# Altium PCB Antenna.PcbDoc
Units mil, origin at the board's own origin, x right, y up, seen from the top; angles counter-clockwise.
Board outline 2240 x 1440 mil, 2 copper layers (Top Layer, Bottom Layer); 1 components, 0 nets, 3 pads, 8 vias.
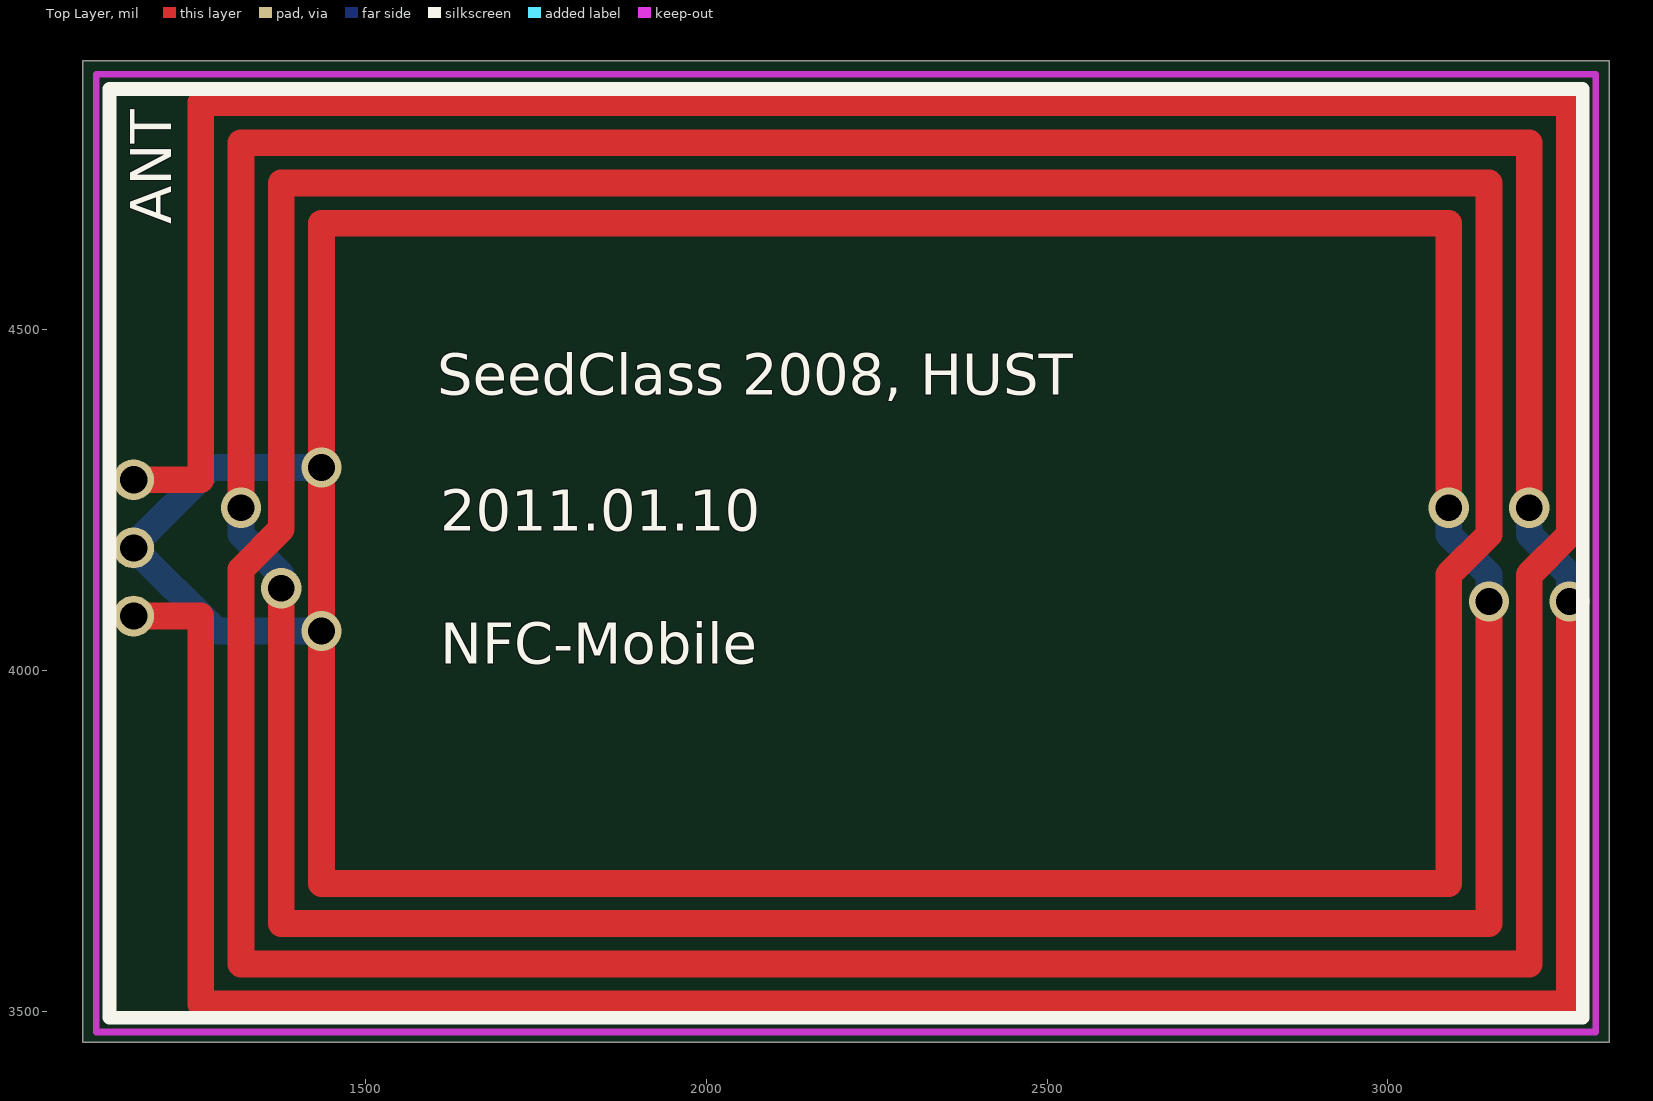
[diagram p0: Top Layer view]
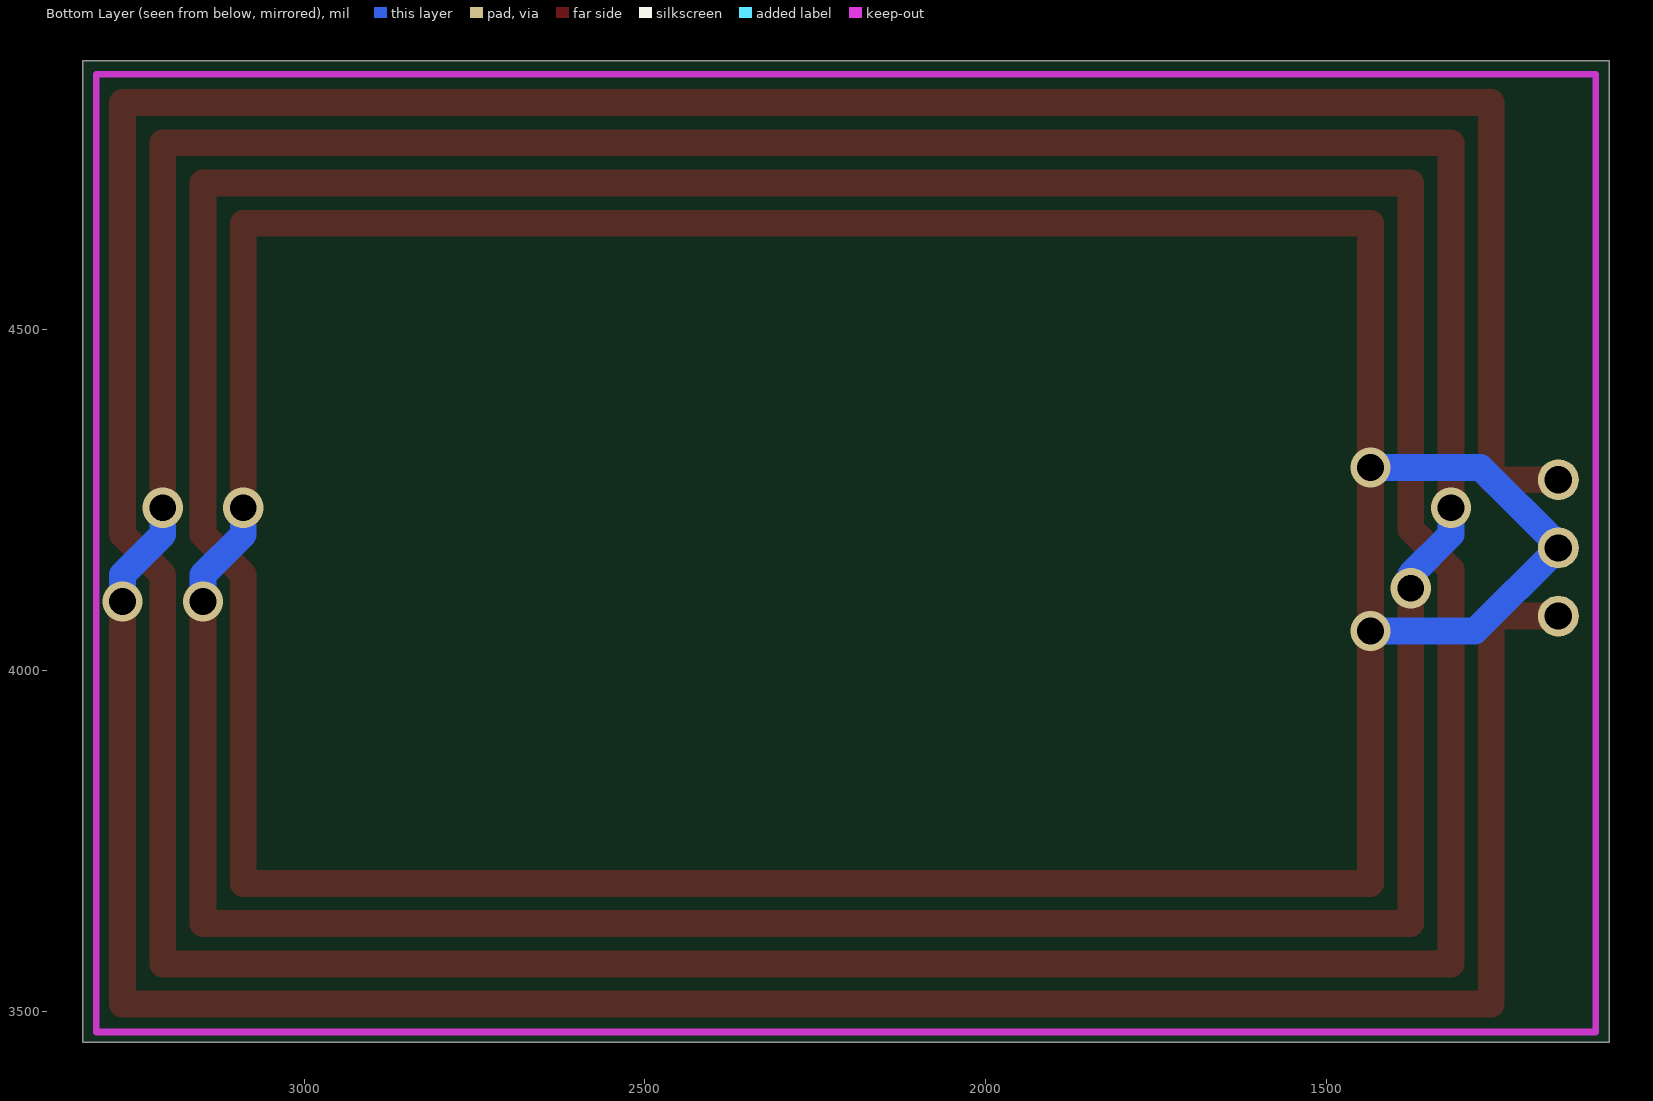
[diagram p1: Bottom Layer view, seen from below]

## Layer stack, top to bottom
Top Layer: signal copper 1.4
Dielectric: dielectric 12.6, FR-4, Dk 4.8
Bottom Layer: signal copper 1.4

## Board outline
1085,4895 3325,4895 3325,3455 1085,3455

## Design rules (kind name [scope] priority, off if disabled: settings)
Clearance [All] p1: gap=10
ComponentClearance [All] p1: gap=10 collisioncheckmode=3 verticalgap=10
PolygonConnect [All] p1: connectstyle=Relief reliefconductorwidth=10 reliefentries=4 polygonreliefangle="90 Angle"
RoutingVias [All] p1: holewidth=28 width=50 viastyle="Through Hole" minholewidth=28 minwidth=50 maxholewidth=28 maxwidth=50
SolderMaskExpansion [All] p1: expansion=4
TestPointUsage [All] p1: valid=0 allowmultiple=FALSE
Testpoint [All] p1: side=15 testpointundercomponent=TRUE minsize=40 maxsize=100 preferedsize=60 minholesize=0 maxholesize=40 preferedholesize=32 testpointgrid=1 style=1023 order=0123456789
Width [All] p1: maxlimit=10 minlimit=10 preferedwidth=10
18 further rules are at their usual default settings.

## Components (designator, comment, footprint, x,y, rotation, side; value= is the part's Value field where it differs from the comment)
ANT "Antenna 13.56MHz" ANTENNA-13.56MHZ 1160,4180 r0 top

## Footprints (in the part's own frame and the unit in brackets; to place one, negate y for a bottom-side part, rotate by r counter-clockwise, add the part's x,y. Pads: shape width x height; smd on the part's side, far side on the other; paste and mask are expansions set on the pad)
ANTENNA-13.56MHZ [mil]
  round 60 hole 40: 1(0,100) 2(0,0) 3(0,-100)
  Top Layer lines w39.37: 0,-100 98.43,-100 98.43,-669.29 2106.3,-669.29 2106.3,-78.74 ; 0,100 98.43,100 98.43,653.54 2106.3,653.54 2106.3,19.69 2047.24,-39.37 2047.24,-118.11 2047.24,-610.24 157.48,-610.24 157.48,-31.5 216.54,27.56 216.54,535.43 1988.19,535.43 1988.19,19.69 1929.13,-39.37 1929.13,-492.13 275.59,-492.13 275.59,476.38 1929.13,476.38 1929.13,59.06 ; 157.48,59.06 157.48,594.49 2047.24,594.49 2047.24,59.06 ; 216.54,-59.06 216.54,-551.18 1988.19,-551.18 1988.19,-78.74
  Bottom Layer lines w39.37: 157.48,59.06 157.48,19.69 216.54,-39.37 216.54,-59.06 ; 275.59,-122.05 122.05,-122.05 0,0 0,3.94 114.17,118.11 275.59,118.11 ; 1929.13,59.06 1929.13,19.69 1988.19,-39.37 1988.19,-78.74 ; 2047.24,59.06 2047.24,19.69 2106.3,-39.37 2106.3,-78.74
  silkscreen extent -35,-689 2126,673

## Part data
ANT: library part Antenna-13.56MHz

## Via types
v1: diameter 59.06, hole 39.37, Top Layer to Bottom Layer, 8 vias

## Nets (pads, with @x,y where several pads share a name; then routed paths per layer and width w, separated by ;. In a path a pad name is that pad's centre, name@x,y a point inside that pad or via, vN(x,y) a via of type N, cw(c..) or ccw(c..) an arc to the next point about the centre after c; other vN are vias at no path point)
pads on no net: ANT.1 ANT.2 ANT.3
copper on no net:
  other v1: 1435.59,4057.95 3148.19,4101.26 3266.3,4101.26 1376.54,4120.94 1317.48,4239.06 3089.13,4239.06 3207.24,4239.06 1435.59,4298.11

## Keep-outs
Keep-Out Layer:
  lines w10: 1105,3470 1105,4875 3305,4875 3305,3470 1105,3470

## Silkscreen, mask and mechanical layers (free items; w line width, h text height)
Top Overlay:
  text "SeedClass 2008, HUST" at 1605,4405 h60
  text "2011.01.10" at 1610,4205 h60
  text "NFC-Mobile" at 1610,4010 h60

## Dimensions
1105,3470 to 3305,3470 on Keep-Out Layer
1105,4875 to 1105,3470 on Keep-Out Layer